# Altium PCB PCB1.PcbDoc
Units mm, origin at the board's own origin, x right, y up, seen from the top; angles counter-clockwise.
Board outline 95 x 90.04 mm, 2 copper layers (Top Layer, Bottom Layer); 10 components, 20 nets, 82 pads, 0 vias.
Unrouted connection lines stored in the file: 3.
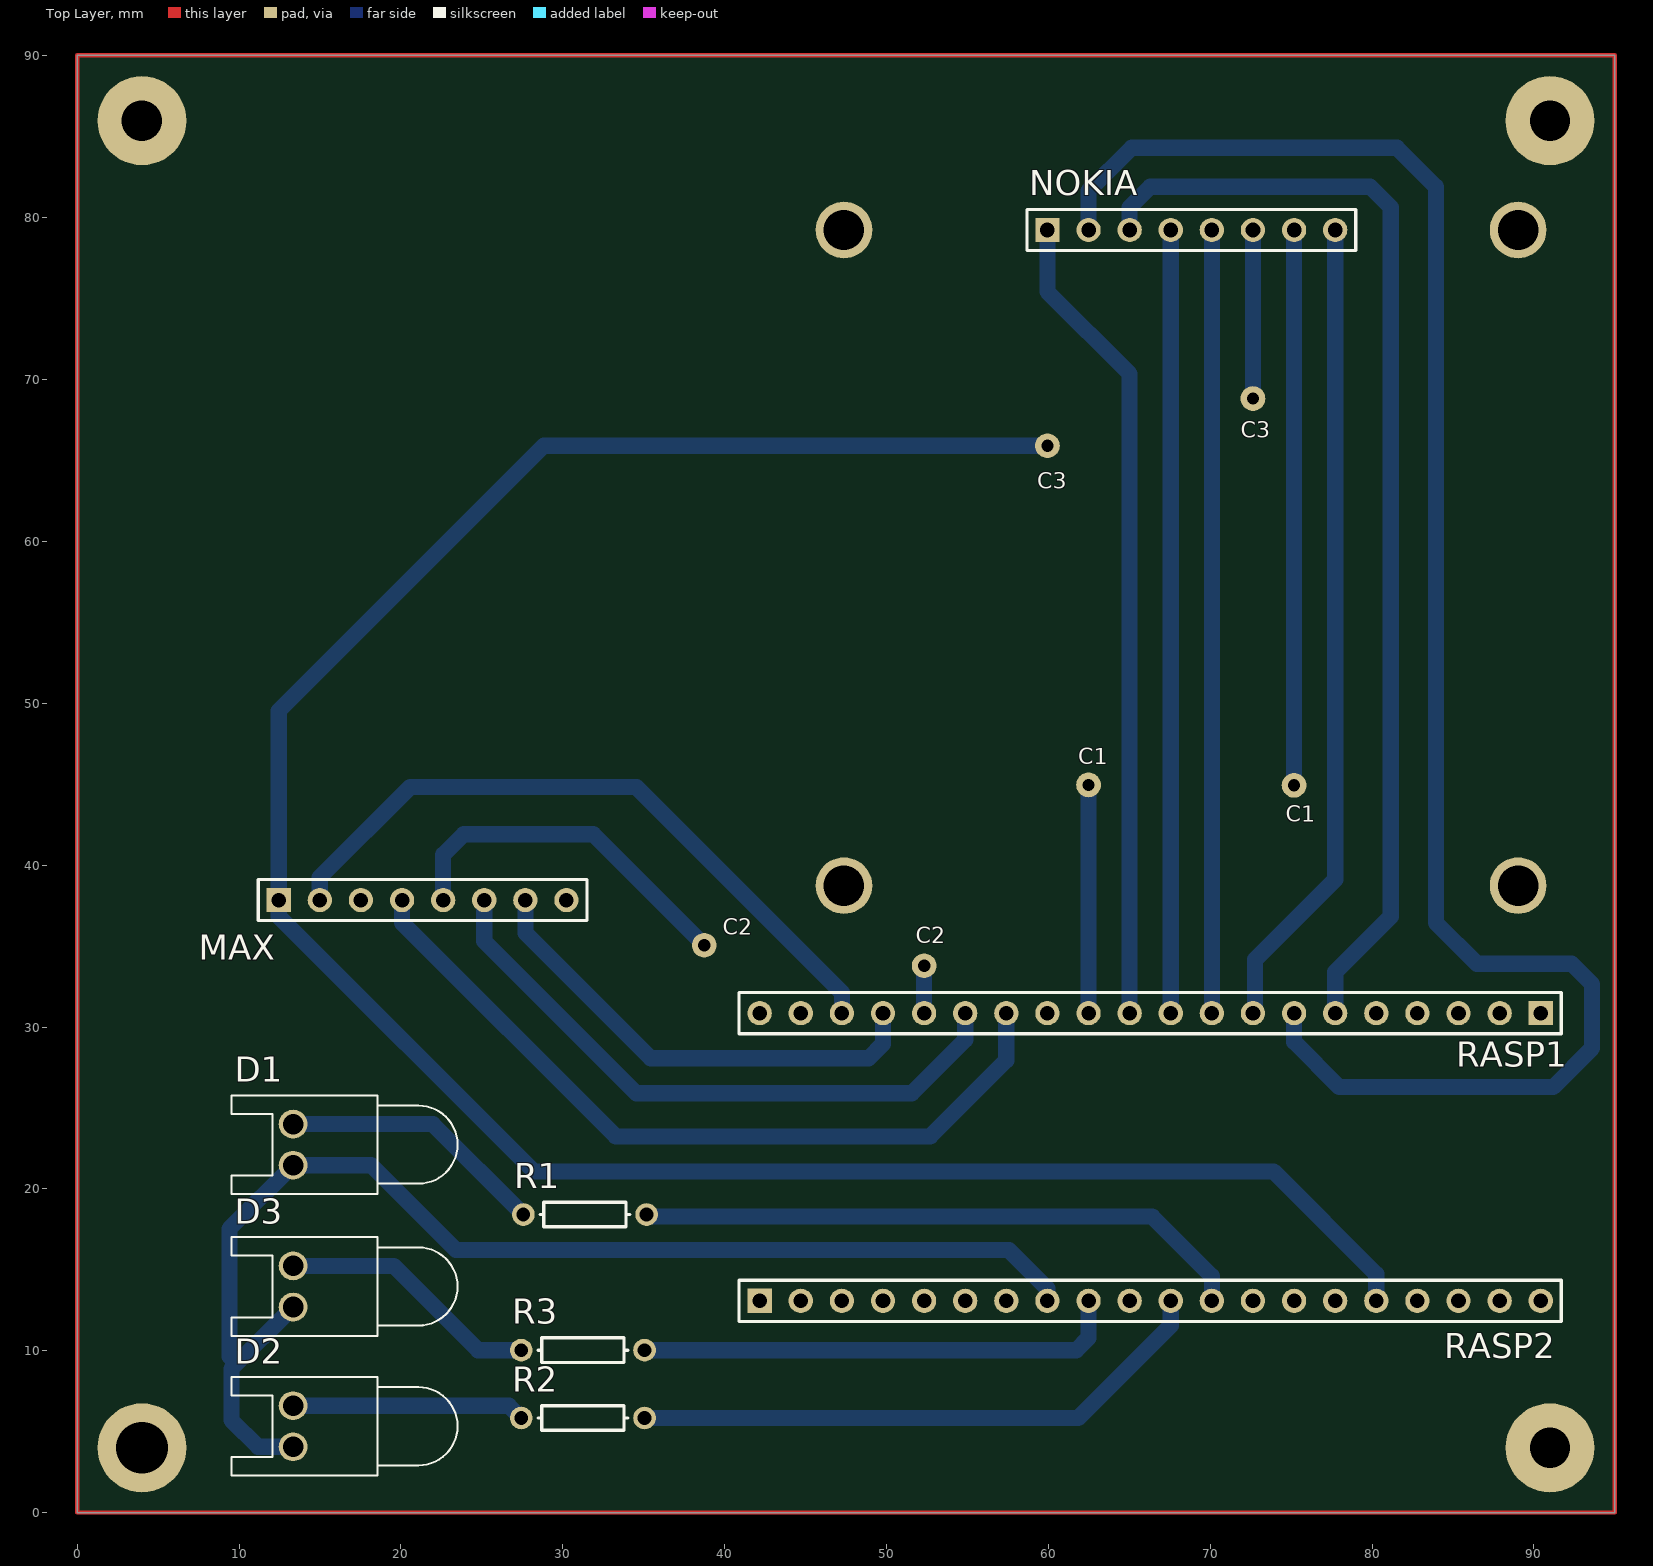
[diagram p0: Top Layer view]
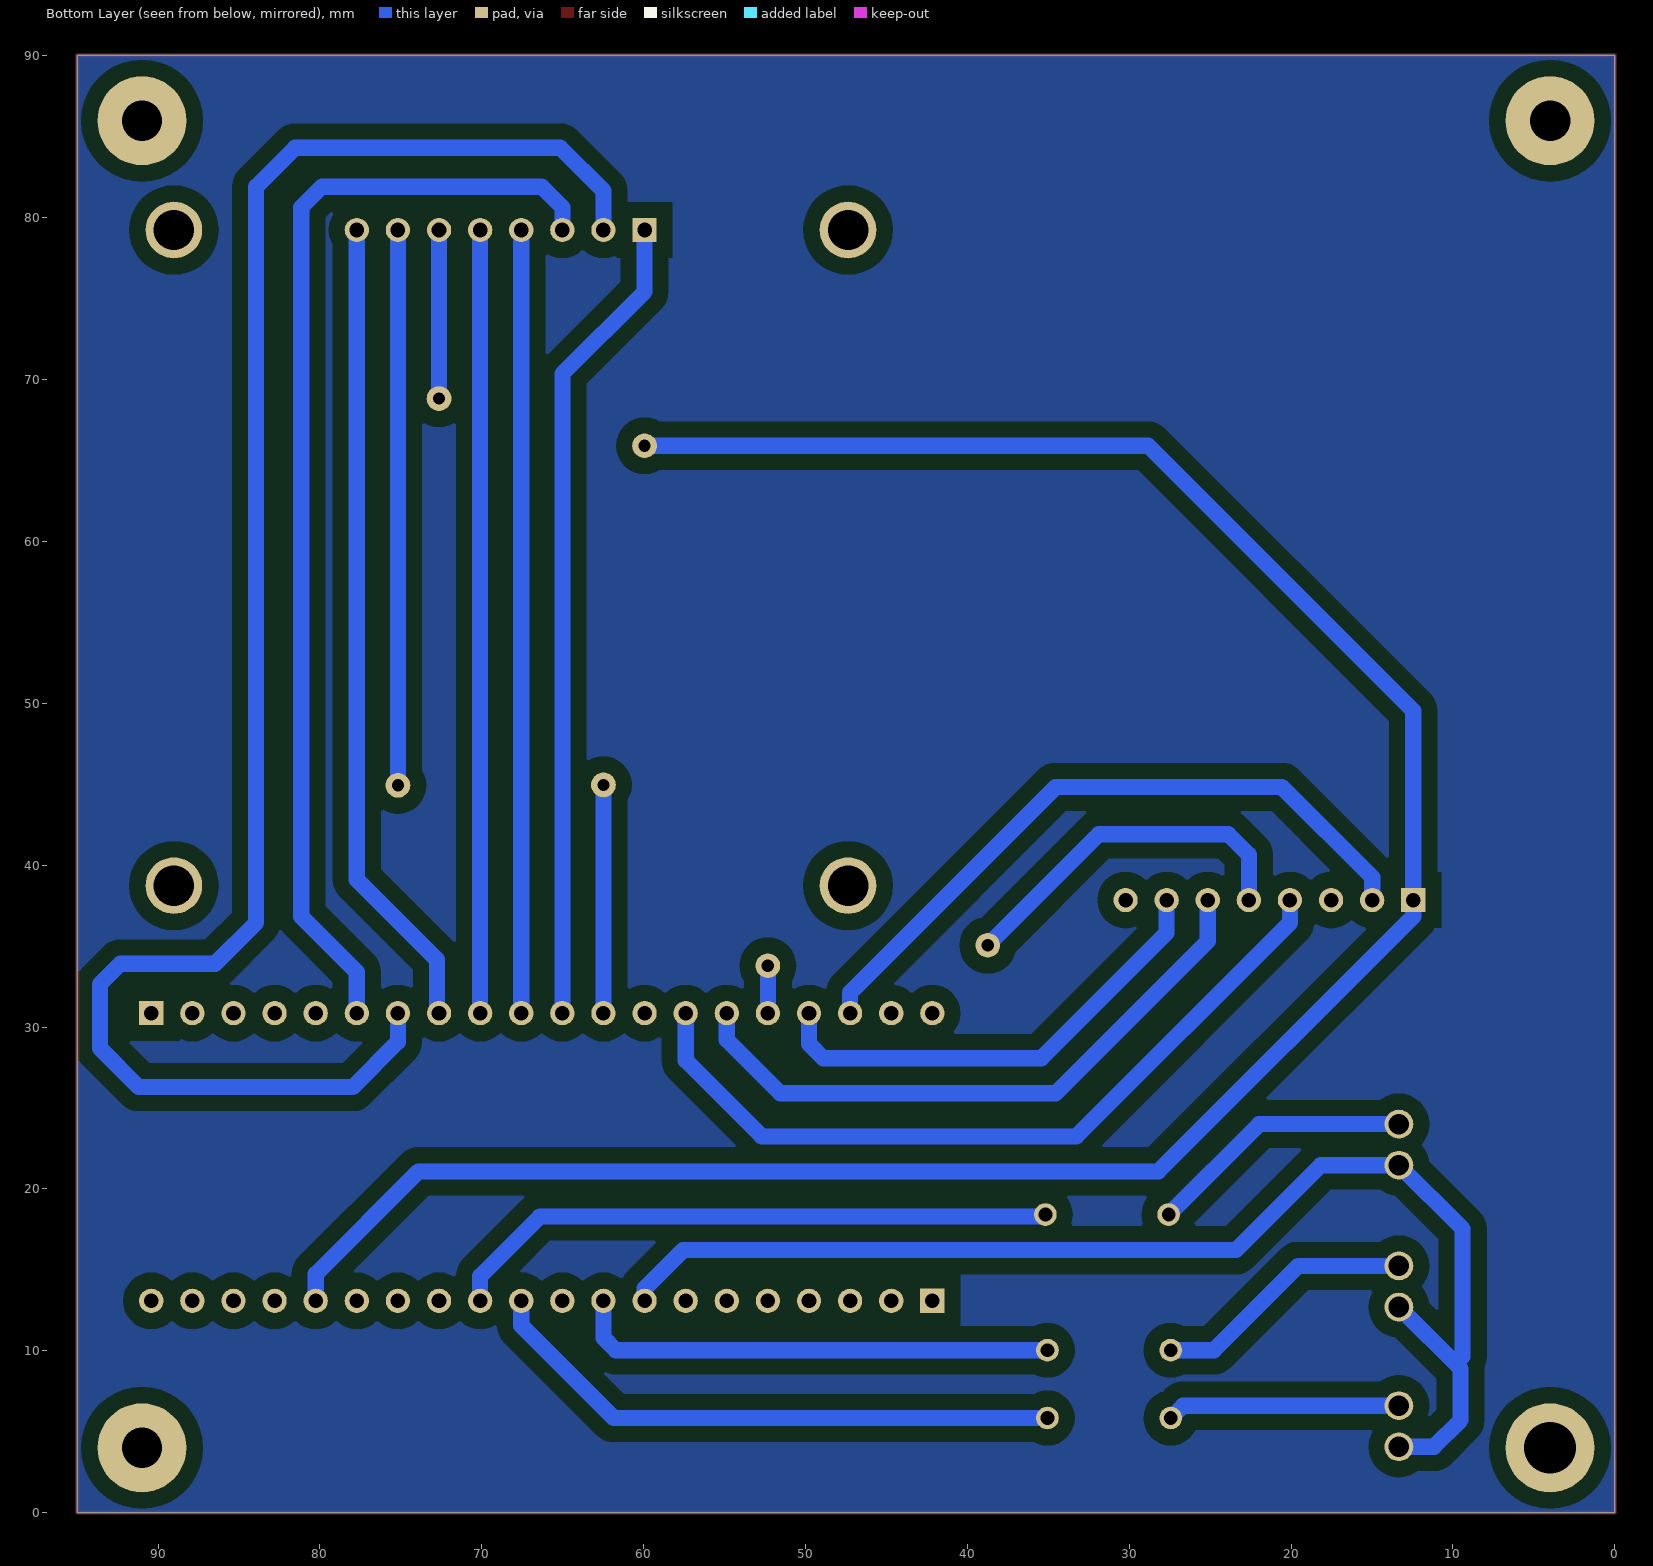
[diagram p1: Bottom Layer view, seen from below]

## Layer stack, top to bottom
Top Solder: solder mask 0.0102, Solder Resist, Dk 3.5
Top Layer: signal copper 0.0356
Dielectric 1: dielectric 0.32, FR-4, Dk 4.8
Bottom Layer: signal copper 0.0356
Bottom Solder: solder mask 0.0102, Solder Resist, Dk 3.5

## Board outline
94.996,0 94.996,90.043 0,90.043 0,0

## Design rules (kind name [scope] priority, off if disabled: settings)
Clearance [All] p1: gap=1 ignorepadtopadclearanceinfootprint=FALSE
PolygonConnect [All] p1: connectstyle=Relief reliefconductorwidth=0.254 reliefentries=4 polygonreliefangle="90 Angle" airgapwidth=0.254
RoomDefinition PCB1 [InComponentClass('PCB1')] p1: confinementstyle=ConfineIn formatcopy=TRUE lockcomponents=FALSE outline 0,0 94.869,0 94.869,90.17 0,90.17
RoutingVias [All] p1: holewidth=0.711 width=1.27 viastyle="Through Hole" minholewidth=0.711 minwidth=1.27 maxholewidth=0.711 maxwidth=1.27
SolderMaskExpansion [All] p1: expansion=0.102
Width [All] p1: maxlimit=1.2 minlimit=1 preferedwidth=1 bottomlayer_maxwidth=1 minimp=50.000000 maximp=50.000000 favimp=50.000000
30 further rules are at their usual default settings.

## Components (designator, comment, footprint, x,y, rotation, side; value= is the part's Value field where it differs from the comment)
D1 "LED0" LED-0 13.335,22.733 r90 top
D2 "LED0" LED-0 13.335,5.334 r90 top
D3 "LED0" LED-0 13.335,13.97 r90 top
MAX "Header 8" HDR1X8 12.446,37.846 r0 top
NOKIA "Header 8" HDR1X8 59.944,79.248 r0 top
R1 "Res1" AXIAL-0.3 31.369,18.415 r180 top value=220
R2 "Res1" AXIAL-0.3 31.242,5.842 r180 top value=220
R3 "Res1" AXIAL-0.3 31.242,10.033 r180 top value=220
RASP1 "Header 20" HDR1X20 90.424,30.861 r180 top
RASP2 "Header 20" HDR1X20 42.164,13.081 r0 top

## Footprints (in the part's own frame and the unit in brackets; to place one, negate y for a bottom-side part, rotate by r counter-clockwise, add the part's x,y. Pads: shape width x height; smd on the part's side, far side on the other; paste and mask are expansions set on the pad)
AXIAL-0.3 [mm] "Axial Device, Thru-Hole; 2 Leads; 0.3 in Pin Spacing"
  round 1.4 hole 0.85: 1(-3.81,0) 2(3.81,0)
  silkscreen extent -2.77,-0.76 2.77,0.76
HDR1X8 [mm] "Connector; Header; 8 Position"
  rect 1.5x1.5 hole 0.9: 1(0,0)
  round 1.5 hole 0.9: 2(2.54,0) 3(5.08,0) 4(7.62,0) 5(10.16,0) 6(12.7,0) 7(15.24,0) 8(17.78,0)
  silkscreen extent -1.27,-1.27 19.05,1.27
HDR1X20 [mm] "Connector; Header; 20 Position"
  rect 1.5x1.5 hole 0.9: 1(0,0)
  round 1.5 hole 0.9: 2(2.54,0) 3(5.08,0) 4(7.62,0) 5(10.16,0) 6(12.7,0) 7(15.24,0) 8(17.78,0) 9(20.32,0) 10(22.86,0) 11(25.4,0) 12(27.94,0) 13(30.48,0) 14(33.02,0) 15(35.56,0) 16(38.1,0) 17(40.64,0) 18(43.18,0) 19(45.72,0) 20(48.26,0)
  silkscreen extent -1.27,-1.27 49.53,1.27
LED-0 [mil] "LED; 2 Leads"
  round 70 hole 50: 1(50,0) 2(-50,0)
  silkscreen extent -120,-400 120,150

## Part data
D1 D2 D3: "Typical INFRARED GaAs LED", LatestRevisionDate=08-Jul-2005, LatestRevisionNote="Mech Layer 1 removed.", PackageDescription="LED; 2 Leads", PackageReference=LED-0, Published=8-Jun-2000, Publisher="Altium Limited"
MAX NOKIA: "Header, 8-Pin", LatestRevisionDate=17-Jul-2002, LatestRevisionNote="Re-released for DXP Platform.", Publisher="Altium Limited"
R1 R2 R3: "Resistor", LatestRevisionDate=17-Jul-2002, LatestRevisionNote="Re-released for DXP Platform.", PackageDescription="Axial Device, Thru-Hole; 2 Leads; 0.3 in Pin Spacing", PackageReference=AXIAL-0.3, Published=8-Jun-2000, Publisher="Altium Limited"
RASP1 RASP2: "Header, 20-Pin", LatestRevisionDate=17-Jul-2002, LatestRevisionNote="Re-released for DXP Platform.", Publisher="Altium Limited"

## Free pads (board coordinates)
  round 5.5 hole 3.2: 3(3.996,4)
  round 5.5 hole 2.5: 3(3.996,86) 3(90.996,4) 3(90.996,86)
  round 3.5 hole 2.5: 4(47.371,38.735) 4(47.371,79.248) 4(89.027,38.735) 4(89.027,79.248)
  round 1.524 hole 0.762: 5(59.944,65.913) 6(72.644,68.834) 7(62.484,44.958) 8(75.184,44.933) 9(38.735,35.052) 10(52.324,33.782)

## Nets (pads, with @x,y where several pads share a name; then routed paths per layer and width w, separated by ;. In a path a pad name is that pad's centre, name@x,y a point inside that pad or via, vN(x,y) a via of type N, cw(c..) or ccw(c..) an arc to the next point about the centre after c; other vN are vias at no path point)
NetD1_1: D1.1 R1.2 | length 16.5
  Bottom Layer w1: D1.1 21.971,24.003 R1.2
NetD2_1: D2.1 R2.2 | length 14.4
  Bottom Layer w1: D2.1 26.67,6.604 R2.2
NetD3_1: D3.1 R3.2 | length 16.3
  Bottom Layer w1: D3.1 19.558,15.24 24.765,10.033 R3.2
NetGnd: D1.2 D2.2 D3.2 RASP2.8 | length 77.6
  Bottom Layer w1: 9.779,9.271 9.398,9.652 9.398,17.526 D1.2 18.161,21.463 23.409,16.215 57.572,16.215 59.944,13.843 RASP2.8 ; D2.2 11.176,4.064 9.525,5.715 9.525,8.89 D3.2
NetMAX_1: MAX.1 NOKIA.6 pad.5 pad.6 RASP2.16 | length 156.3
  Bottom Layer w1: pad.5@60.198,65.913 28.829,65.913 12.446,49.53 MAX.1 12.446,36.83 28.194,21.082 73.914,21.082 80.264,14.732 RASP2.16 ; pad.6 NOKIA.6
NetMAX_4: MAX.4 RASP1.14 | length 49.1
  Bottom Layer w1: MAX.4 20.066,36.449 33.274,23.241 52.705,23.241 57.404,27.94 RASP1.14
NetMAX_5: MAX.5 pad.9 pad.10 RASP1.16 | length 25.2
  Bottom Layer w1: MAX.5 22.606,40.64 23.876,41.91 31.877,41.91 pad.9 ; RASP1.16 pad.10
NetMAX_6: MAX.6 RASP1.15 | length 39.2
  Bottom Layer w1: MAX.6 25.146,35.306 34.544,25.908 51.562,25.908 54.864,29.21 RASP1.15
NetMAX_7: MAX.7 RASP1.17 | length 29.6
  Bottom Layer w1: MAX.7 27.686,35.814 35.433,28.067 48.895,28.067 49.784,28.956 RASP1.17
NetMAX_GND: MAX.2 RASP1.18 | length 42.5
  Bottom Layer w1: MAX.2 14.986,39.243 20.574,44.831 34.544,44.831 47.244,32.131 RASP1.18
NetNOKIA_1: NOKIA.1 RASP1.11 | length 50.5
  Bottom Layer w1: NOKIA.1 59.944,75.438 65.024,70.358 RASP1.11
NetNOKIA_2: NOKIA.2 RASP1.7 | length 109
  Bottom Layer w1: NOKIA.2 62.484,81.661 65.151,84.328 81.534,84.328 83.947,81.915 83.947,36.449 86.487,33.909 92.329,33.909 93.599,32.639 93.599,28.702 91.186,26.289 77.978,26.289 75.184,29.083 RASP1.7
NetNOKIA_3: NOKIA.3 RASP1.6 | length 69.8
  Bottom Layer w1: NOKIA.3 65.024,80.645 66.294,81.915 79.883,81.915 81.153,80.645 81.153,36.83 77.724,33.401 RASP1.6
NetNOKIA_4: NOKIA.4 RASP1.10 | length 48.4
  Bottom Layer w1: RASP1.10 NOKIA.4
NetNOKIA_5: NOKIA.5 RASP1.9 | length 48.4
  Bottom Layer w1: RASP1.9 NOKIA.5
NetNOKIA_7: NOKIA.7 pad.7 pad.8 RASP1.12 | length 48.4
  Bottom Layer w1: RASP1.12 pad.7 ; pad.8 75.184,44.958 NOKIA.7
NetNOKIA_8: NOKIA.8 RASP1.8 | length 50.4
  Bottom Layer w1: RASP1.8@72.517,30.988 72.771,31.242 72.771,34.163 77.724,39.116 NOKIA.8
NetR1_1: R1.1 RASP2.12 | length 38
  Bottom Layer w1: R1.1@35.179,18.288 66.421,18.288 70.104,14.605 RASP2.12
NetR2_1: R2.1 RASP2.11 | length 36.4
  Bottom Layer w1: R2.1 61.849,5.842 67.564,11.557 RASP2.11
NetR3_1: R3.1 RASP2.9 | length 30
  Bottom Layer w1: R3.1 61.722,10.033 62.484,10.795 RASP2.9
pads on no net: MAX.3 MAX.8 RASP1.1 RASP1.2 RASP1.3 RASP1.4 RASP1.5 RASP1.13 RASP1.19 RASP1.20 RASP2.1 RASP2.2 RASP2.3 RASP2.4 RASP2.5 RASP2.6 RASP2.7 RASP2.10 RASP2.13 RASP2.14 RASP2.15 RASP2.17 RASP2.18 RASP2.19 RASP2.20
copper on no net: | length 370.1
  Top Layer w0.254: 0,0 0,90.043 94.996,90.043 94.996,0 0,0

## Polygon pours and split planes (outlines as drawn)
no net on Top Layer "Top Layer-No Net 3" (solid, pour order 40): 0,0
no net on Top Layer "Top Layer-No Net 2" (solid, pour order 20): -5.969,102.743
no net on Top Layer "Top Layer-No Net 1" (solid, pour order 4): 126.111,7.874
no net on Bottom Layer "Bottom Layer-No Net" (solid, pour order 46): 0,0 0,90.043 94.996,90.043 94.996,0

## Silkscreen, mask and mechanical layers (free items; w line width, h text height)
Top Overlay:
  text "C3" at 71.882,66.421 h1
  text "C3" at 59.309,63.246 h1
  text "C1" at 61.849,46.228 h1
  text "C1" at 74.676,42.672 h1
  text "C2" at 39.878,35.687 h1
  text "C2" at 51.816,35.179 h1